# EAGLE board main (EAGLE 8.7.1)
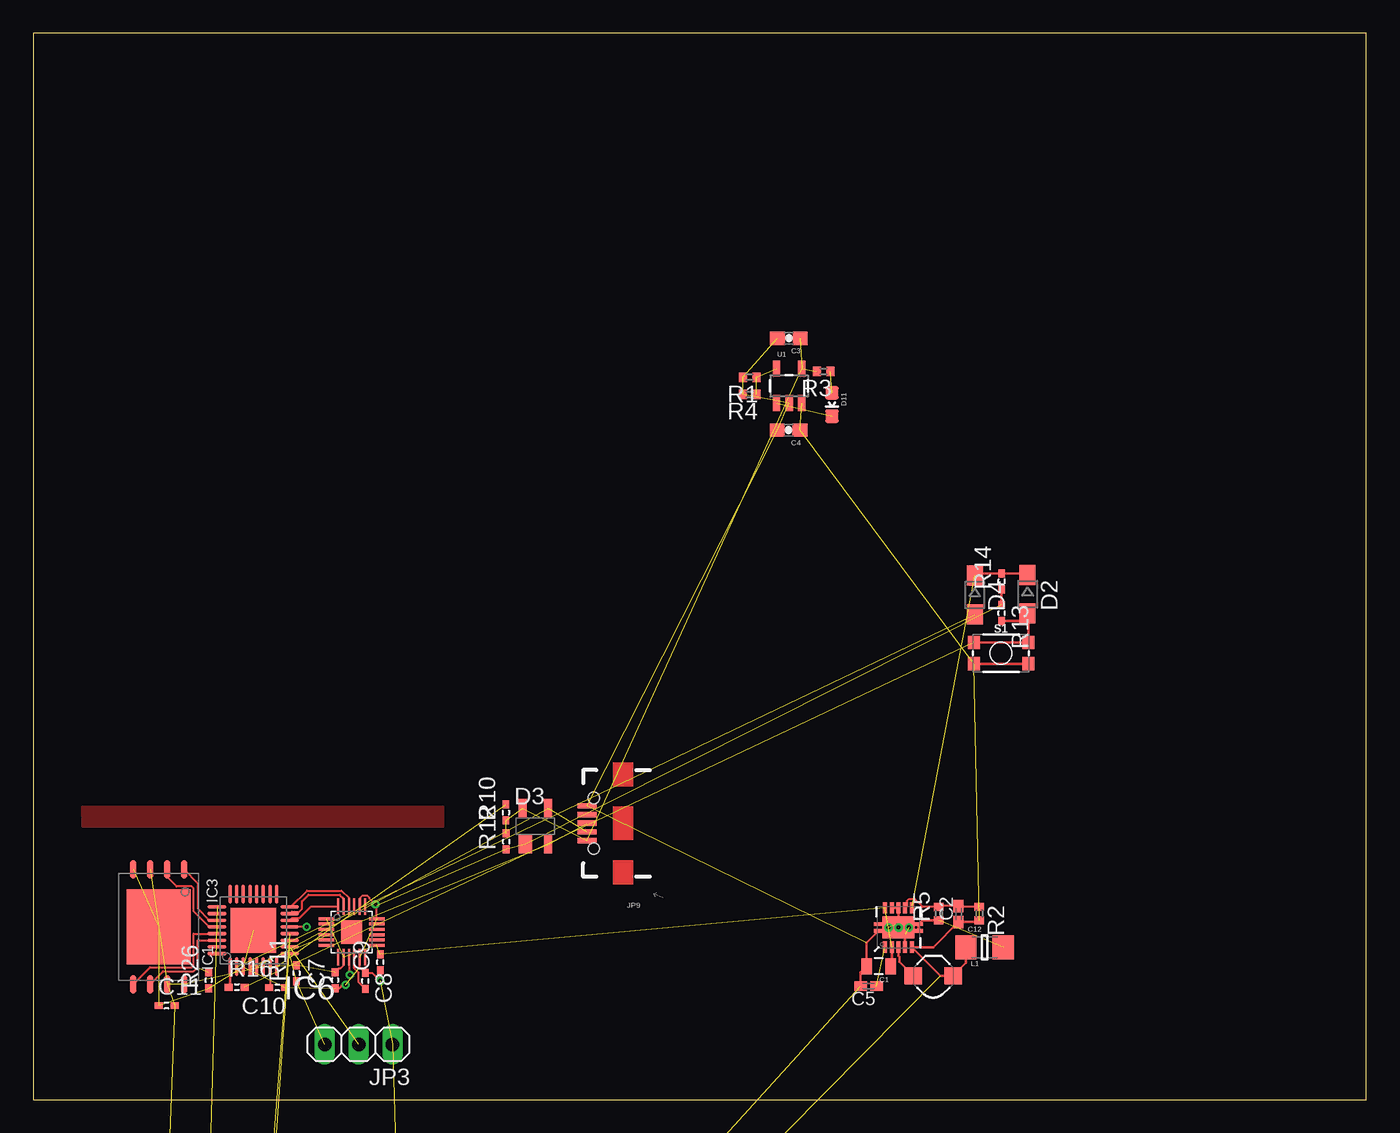
[diagram p0: board, top side]
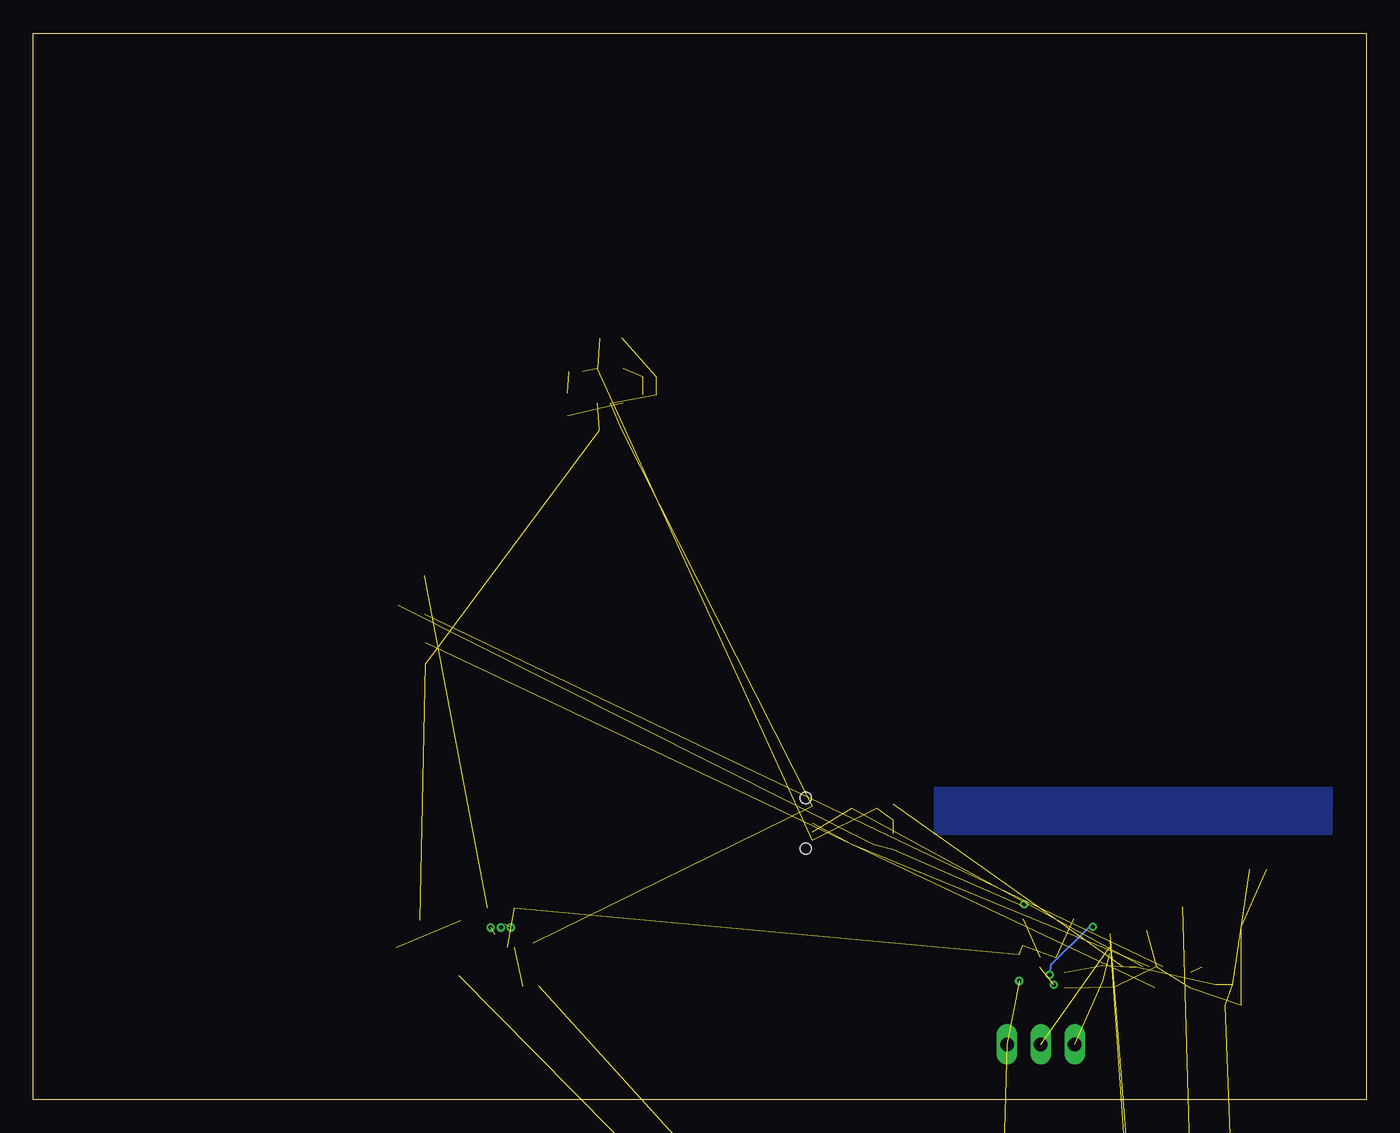
[diagram p1: board, bottom side, seen from below]

Size 100 x 80 mm. Coordinates in mm from the lower left corner, seen from the top.
Outline: 0,0 100,0 100,80 0,80 0,0
Copper layers (1*16): Top 0.035mm / dielectric 1.5mm / Bottom 0.035mm
Design rules "Fusion_eagle_rule_v1.1": minimum track width 6mil, minimum drill 12mil, track to track 6mil, track to pad 6mil, pad to pad 6mil, via to via 6mil, smd to smd 0mil, copper to edge 10mil, drill to drill 10mil, minimum pad ring 10mil, minimum via ring 6mil, stop-mask expansion 2mil, vias tented up to drill 100mil, thermal gap 10mil

## Footprints (pad centres in the part's own frame; a part is rotated, then mirrored left to right if it is on the bottom)
0805 = smd 0.8 x 1.2: 1 -0.9,0; 2 0.9,0
C0402K = smd 0.925 x 0.74: 1 -0.6,0; 2 0.6,0
0603-CAP = smd 1.1 x 1: 1 -0.85,0; 2 0.85,0
1005 = smd 0.6 x 0.5: P$1 -0.6,0; P$2 0.6,0
1206 = smd 1.6 x 1.8: 1 -1.4,0; 2 1.4,0
SOD323-W = smd 1.5 x 1.2: A 1.45,0; C -1.45,0
SOT143 = smd 1 x 1.4: 1 -0.75,-1.35 | smd 0.6 x 1.4: 2 0.95,-1.35; 3 0.95,1.35; 4 -0.95,1.35
LED-0603 = smd 1 x 1: A 0,-0.877; C 0,0.877
SOT23 = smd 0.711 x 1.2: D 0,1.2; G -0.95,-1.2; S 0.95,-1.2
QFN32 = smd 1.4 x 0.25: 1 -2.725,1.75; 2 -2.725,1.25; 3 -2.725,0.75; 4 -2.725,0.25; 5 -2.725,-0.25; 6 -2.725,-0.75; 7 -2.725,-1.25; 8 -2.725,-1.75; 17 2.725,-1.75; 18 2.725,-1.25; 19 2.725,-0.75; 20 2.725,-0.25; 21 2.725,0.25; 22 2.725,0.75; 23 2.725,1.25; 24 2.725,1.75 | smd 0.25 x 1.4: 9 -1.75,-2.725; 10 -1.25,-2.725; 11 -0.75,-2.725; 12 -0.25,-2.725; 13 0.25,-2.725; 14 0.75,-2.725; 15 1.25,-2.725; 16 1.75,-2.725; 25 1.75,2.725; 26 1.25,2.725; 27 0.75,2.725; 28 0.25,2.725; 29 -0.25,2.725; 30 -0.75,2.725; 31 -1.25,2.725; 32 -1.75,2.725 | smd 3.4 x 3.4: B 0,0
V-PDFN-8 = smd 1.4 x 0.5: 1 -4.3,1.905; 2 -4.3,0.635; 3 -4.3,-0.635; 4 -4.3,-1.905; 5 4.3,-1.905; 6 4.3,-0.635; 7 4.3,0.635; 8 4.3,1.905 | smd 5.6 x 4.8: B 0,0
QFN-24 = smd 1.22 x 0.2: 1 -1.89,1; 2 -1.89,0.6; 3 -1.89,0.2; 4 -1.89,-0.2; 5 -1.89,-0.6; 6 -1.89,-1; 13 1.89,-1; 14 1.89,-0.6; 15 1.89,-0.2; 16 1.89,0.2; 17 1.89,0.6; 18 1.89,1 | smd 0.2 x 1.22: 7 -1,-1.89; 8 -0.6,-1.89; 9 -0.2,-1.89; 10 0.2,-1.89; 11 0.6,-1.89; 12 1,-1.89; 19 1,1.89; 20 0.6,1.89; 21 0.2,1.89; 22 -0.2,1.89; 23 -0.6,1.89; 24 -1,1.89 | smd 1.59 x 1.75: B 0,0
JST-2-SMD = smd 1 x 4.6: 1 -1,-3.7; 2 1,-3.7 | smd 1.6 x 3.4: NC1 -3.4,1.5; NC2 3.4,1.5
1X01 = drill 1.016 octagon: 1 0,0
1X03 = drill 1.016 long: 1 -2.54,0; 2 0,0; 3 2.54,0
USB-AB-MICRO-SMD_V03 = smd 1.4 x 0.4: D+1 2.7,0; D-1 2.7,0.65; GND1 2.7,-1.3; ID1 2.7,-0.65; VBUS1 2.7,1.3 | hole 0.85: 2.2,1.9; 2.2,-1.9
CDRH2D09 = smd 1.3 x 1.3: P$1 -1.5,0; P$2 1.5,0
1608-OLI = smd 0.89 x 0.76: A -0.825,0; K 0.825,0
TP10R = smd 1 x 1: TP 0,0
R0402 = smd 0.6 x 0.7: 1 -0.5,0; 2 0.5,0
TACTILE_SWITCH_SMD_4.6X2.8MM = smd 0.9 x 1: 1 -2.05,-0.8; 2 2.05,-0.8; 3 2.05,0.8; 4 -2.05,0.8
SOT23-5 = smd 0.55 x 1.2: 1 -0.95,-1.3; 2 0,-1.3; 3 0.95,-1.3; 4 0.95,1.3; 5 -0.95,1.3
QFN-10_PAD = smd 0.297 x 0.85: 1 -1,-1.475; 2 -0.5,-1.475; 3 0,-1.475; 4 0.5,-1.475; 5 1,-1.475; 6 1,1.475; 7 0.5,1.475; 8 0,1.475; 9 -0.5,1.475; 10 -1,1.475 | smd 0.7 x 0.28: 11 -1.5,0.25; 12 -1.5,-0.25; 13 1.5,0.25; 14 1.5,-0.25 | smd 2.4 x 1.65: 15 0,0

## Placement (x,y rotation side)
C1  22uF  [0805]  63.42,10.01 180 top
C2  0.1uF  [C0402K]  69.42,13.92 90 top
C3  4.7uF  [0603-CAP]  56.68,57.12 180 top
C4  4.7uF  [0603-CAP]  56.67,50.23 180 top
C5  0.1uF  [C0402K]  62.66,8.51 180 top
C7  10n  [1005]  22.64,8.95 90 top
C8  0.1u  [1005]  24.9,8.89 270 top
C9  0.1u  [1005]  26.04,10.3 90 top
C10  1.0u  [1005]  18.3,8.41 180 top
C11  0.1u  [1005]  9.99,7.06 0 top
C12  10uF  [1206]  71.37,11.42 0 top
D2  [SOD323-W]  74.6,37.91 270 top
D3  SP0503BAH  [SOT143]  37.67,20.51 0 top
D4  [SOD323-W]  70.64,37.86 270 top
D11  RED  [LED-0603]  59.92,52.15 180 top
FET1  DMN3404L  [SOT23]  2.54,-185.42 0 top  (outside the outline)
IC1  C8051F381-GM  [QFN32]  16.51,12.7 90 top
IC3  N25Q512A  [V-PDFN-8]  9.4,12.95 270 top
IC6  MPU-9250  [QFN-24]  23.88,12.57 0 top
JP1  JST  [JST-2-SMD]  26.67,-27.94 0 top  (outside the outline)
JP2  [1X01]  7.62,-222.12 0 top  (outside the outline)
JP3  [1X03]  24.41,4.14 180 top
JP9  Micro USB  [USB-AB-MICRO-SMD_V03]  44.25,20.73 180 top
L1  4.7uH, 1.2A  [CDRH2D09]  67.51,9.28 0 top
LED1  [1608-OLI]  30.48,-146.05 0 top  (outside the outline)
MN  PTR1TP10R  [TP10R]  2.54,-199.39 0 top  (outside the outline)
MP  PTR1TP10R  [TP10R]  2.54,-203.2 0 top  (outside the outline)
R1  [R0402]  53.75,54.19 180 top
R2  2M  [R0402]  70.97,13.96 270 top
R3  330  [R0402]  59.3,54.64 180 top
R4  2.0k  [R0402]  53.75,52.91 180 top
R5  220k  [R0402]  67.93,13.95 90 top
R9  10k  [1005]  7.62,-146.05 0 top  (outside the outline)
R10  100  [1005]  35.46,21.54 90 top
R11  1k  [1005]  19.75,9.49 90 top
R12  100k  [1005]  35.47,19.35 90 top
R13  10k  [1005]  72.64,36.5 270 top
R14  10k  [1005]  72.64,38.89 90 top
R15  10k  [1005]  2.54,-191.77 0 top  (outside the outline)
R16  10k  [1005]  15.27,8.42 0 top
R17  100  [1005]  2.54,-212.09 0 top  (outside the outline)
R18  [R0402]  1.14,-232.21 0 top  (outside the outline)
R26  1k  [1005]  13.16,8.95 90 top
S1  [TACTILE_SWITCH_SMD_4.6X2.8MM]  72.61,33.49 0 top
SW2  PTR1TP10R  [TP10R]  8.89,-154.94 0 top  (outside the outline)
U1  MCP73831  [SOT23-5]  56.71,53.54 0 top
U2  TPS61201  [QFN-10_PAD]  64.91,12.9 0 top

## Library data of the parts
C1 C12 = CH_passive
C2 C5 = rcl; SPICEPREFIX: C
C3 C4 = SparkFun-Capacitors; PROD_ID: CAP-08280
C7-C11 R9-R17 R26 = reg,cap
D2-D4 = diode
D11 = SparkFun-LED; PROD_ID: DIO-00819
FET1 = MOSFET
IC1 = C8051F34x
IC3 = EEPROM
IC6 = GYRO
JP1 = SparkFun-Connectors; PROD_ID: CONN-08352
JP2 JP3 = pinhead
JP9 = SparkFun-Connectors; PROD_ID: CONN-11794
L1 U2 = SparkFun
LED1 = LED
MN MP SW2 = testpad
R1-R5 R18 = rcl; SPICEPREFIX: R
S1 = SparkFun-Switches; PROD_ID: SWCH-13065
U1 = SparkFun-PowerIC; PROD_ID: IC-09995

## Nets
C2CK: IC1.9 JP3.3 R11.P$1
C2D: IC1.10 JP3.2
D+: D3.2 IC1.4 JP9.D+1
D-: D3.3 IC1.5 JP9.D-1
DGND: C7.P$1 C8.P$1 C9.P$1 C10.P$1 C11.P$1 D3.1 FET1.S IC1.3 IC1.B IC3.4 IC3.B IC6.11 IC6.18 IC6.20 JP3.1 LED1.K R12.P$1 R13.P$1 R14.P$1 R15.P$1 R26.P$1
EEPROM_!CS: IC1.27 IC3.1
EEPROM_MISO: IC1.28 IC3.2
EEPROM_MOSI: IC1.29 IC3.5
EEPROM_SCK: IC1.30 IC3.6 R26.P$2
GND: C1.2 C3.2 C4.2 C5.2 C12.2 JP1.1 JP9.GND1 R1.2 R4.2 R5.1 U1.2 U2.4 U2.8 U2.9 U2.11 U2.12 U2.13 U2.14 U2.15
IMU_!CS: IC1.16 IC6.22
IMU_MISO: IC1.13 IC6.9
IMU_MOSI: IC1.14 IC6.24
IMU_SCK: IC1.15 IC6.23
N$1: C5.1 U2.1
N$2: L1.P$1 U2.3
N$3: D11.A R3.1
N$4: IC1.25 SW2.TP
N$5: IC1.1 R16.P$1
N$6: D2.C D4.C R14.P$2 U2.6
N$7: D4.A IC1.2
N$8: FET1.G R17.P$1
N$9: LED1.A R9.P$1
N$10: FET1.D MN.TP
N$11: D2.A R13.P$2 R16.P$2 S1.3 S1.4
N$12: IC1.32
N$13: C8.P$2 IC6.10
N$15: IC1.11 JP2.1 R9.P$2
N$18: IC1.8 R10.P$2
PROG: R1.1 R4.1 U1.5
PWM: IC1.12 R15.P$2 R17.P$2
STAT: D11.C U1.1
UVLO: C2.2 R2.1 R5.2 U2.7
VBAT: C2.1 C4.1 C12.1 JP1.2 L1.P$2 R2.2 S1.1 S1.2 U1.3 U2.5
VBUS: C3.1 D3.4 JP9.VBUS1 R3.2 R10.P$1 R12.P$2 U1.4
VCC: C1.1 C7.P$2 C9.P$2 C10.P$2 C11.P$2 IC1.6 IC1.7 IC3.3 IC3.7 IC3.8 IC6.1 IC6.8 IC6.13 MP.TP R11.P$2 U2.2 U2.10

## Tracks (layer width: path | path; a pad name or v marks a point on that pad's centre or on a via)
C2CK  (2 unrouted)
C2D  (1 unrouted)
D+  (2 unrouted)
D-  (2 unrouted)
DGND  (via drill 0.3)  (16 unrouted)
  Top 0.152: IC6.11 24.48,9.92 C8.P$1 25.41,9.49 v26.04,8.89 C9.P$1 | IC6.18 25.77,14.53 v25.67,14.63 25.2,15.09 25.2,15.15 25.06,15.3 24.7,15.3 24.55,15.15 24.55,14.53 IC6.20 | C7.P$1 22.97,8.35 23.22,8.6 v23.43,8.6
  Top 0.203: R13.P$1 R14.P$1
  pour Bottom: 2.59,23.42 2.62,19.89 32.37,19.89 32.35,23.42
EEPROM_!CS
  Top 0.152: IC3.1 12.33,16.23 12.33,14.33 13.21,13.45 IC1.27
EEPROM_MISO
  Top 0.152: IC3.2 10.03,16.7 10.75,15.98 11.89,15.98 12.03,15.85 12.03,14.13 13.21,12.95 IC1.28
EEPROM_MOSI
  Top 0.152: IC3.5 8.76,9.93 11.89,9.93 12.03,10.06 12.03,12.45 IC1.29
EEPROM_SCK  (1 unrouted)
  Top 0.152: IC3.6 9.73,9.62 12.02,9.62 12.33,9.93 12.33,11.95 IC1.30
GND  (via drill 0.3)  (11 unrouted)
  Top 0.203: U2.13 U2.14 | U2.9 U2.8 U2.15 | U2.13 66.71,13.45 R5.1 | U2.13 65.16,13.15 U2.15 | U2.11 64.66,13.15 U2.15 | U2.15 64.66,12.65 U2.12 62.52,11.77 C1.2 62.06,9.55 C5.2 | U2.4 65.41,12.4 U2.15
  other vias: 64.92,12.9 64.17,12.9 65.68,12.9
IMU_!CS
  Top 0.152: IC1.16 19.3,14.45 20.53,15.67 23.12,15.67 23.68,15.11 IC6.22
IMU_MISO  (via drill 0.3)
  Top 0.152: v20.5,12.95 20.32,12.95 IC1.13 | IC6.9 23.68,9.72 v23.75,9.35
  Bottom 0.152: v23.75,9.35 23.62,10.16 20.75,12.95 v20.5,12.95
IMU_MOSI
  Top 0.152: IC1.14 19.38,13.6 19.96,13.6 20.82,14.46 IC6.24
IMU_SCK
  Top 0.152: IC1.15 19.38,14.1 19.96,14.1 20.16,14.3 20.16,14.88 20.65,15.37 22.99,15.37 23.28,15.08 IC6.23
N$1  (1 unrouted)
N$2
  Top 0.203: U2.3 64.91,10.78 64.98,10.71 64.98,10.32 L1.P$1
N$3  (1 unrouted)
N$4  (1 unrouted)
N$5
  Top 0.203: IC1.1 14.76,8.52 R16.P$1
N$6  (1 unrouted)
  Top 0.203: D4.C 70.82,39.49 R14.P$2 74.47,39.49 D2.C
N$7  (1 unrouted)
N$8  (1 unrouted)
N$9  (1 unrouted)
N$10  (1 unrouted)
N$11  (1 unrouted)
  Top 0.203: S1.4 S1.3 74.66,36.4 D2.A 74.04,35.9 R13.P$2
N$13
  Top 0.152: C8.P$2 24.41,8.79 24.41,9.52 24.08,9.85 IC6.10
N$15  (2 unrouted)
N$18  (1 unrouted)
PROG  (2 unrouted)
PWM  (2 unrouted)
STAT  (1 unrouted)
UVLO
  Top 0.152: R2.1 69.47,14.46 C2.2 68,14.52 R5.2 66.73,14.45 66.15,15.03 65.67,15.03 65.53,14.9 65.53,14.5 U2.7
VBAT  (4 unrouted)
  Top 0.203: R2.2 70.82,13.32 C2.1 67.53,11.43 U2.5 68.05,9.28 L1.P$2 69.97,10.24 C12.1 | S1.1 S1.2
VBUS  (6 unrouted)
VCC  (13 unrouted)
  Top 0.152: C7.P$2 22.93,9.84 23.06,9.84 23.28,10.06 IC6.8 | IC1.7 17.76,8.47 C10.P$2
  Top 0.203: U2.2 64.41,10.09 C1.1
  pour Top: 3.68,21.97 30.73,21.97 30.75,20.51 3.7,20.51